# EAGLE board RectangularThing (EAGLE 7.7.0), part 1 of 2
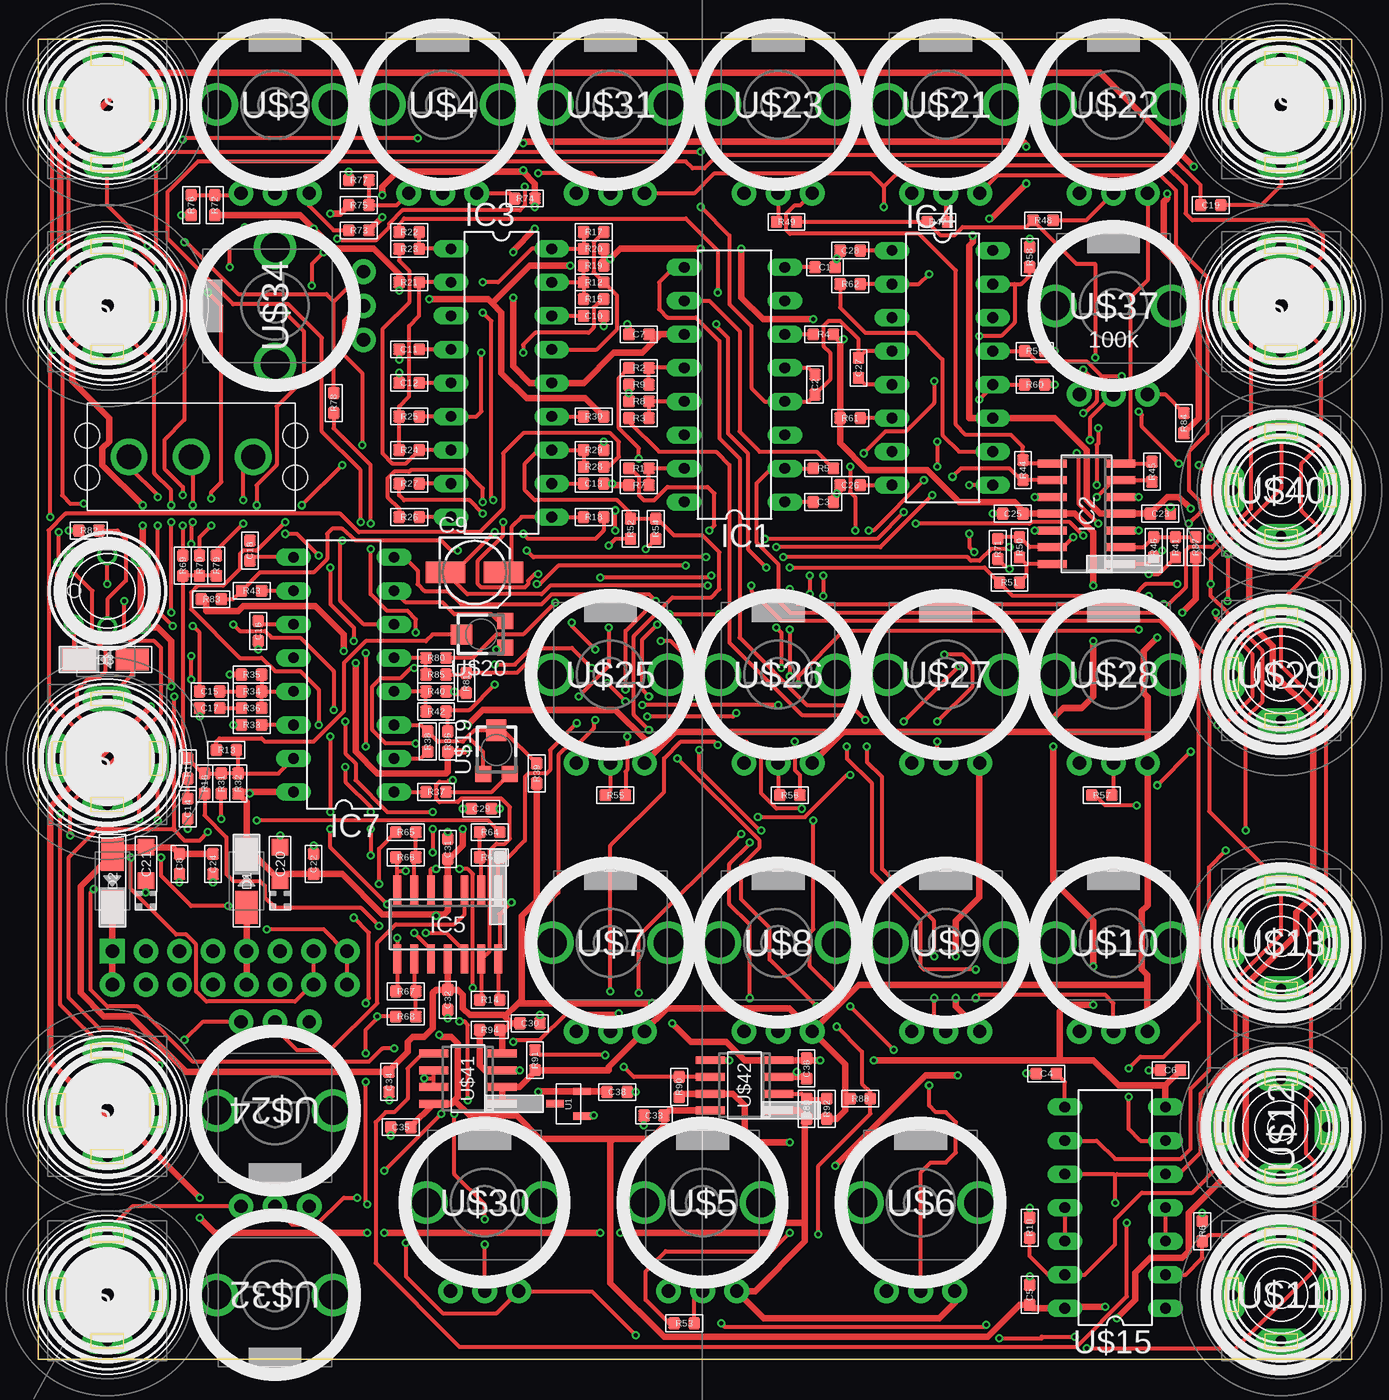
[diagram p0: board, top side]
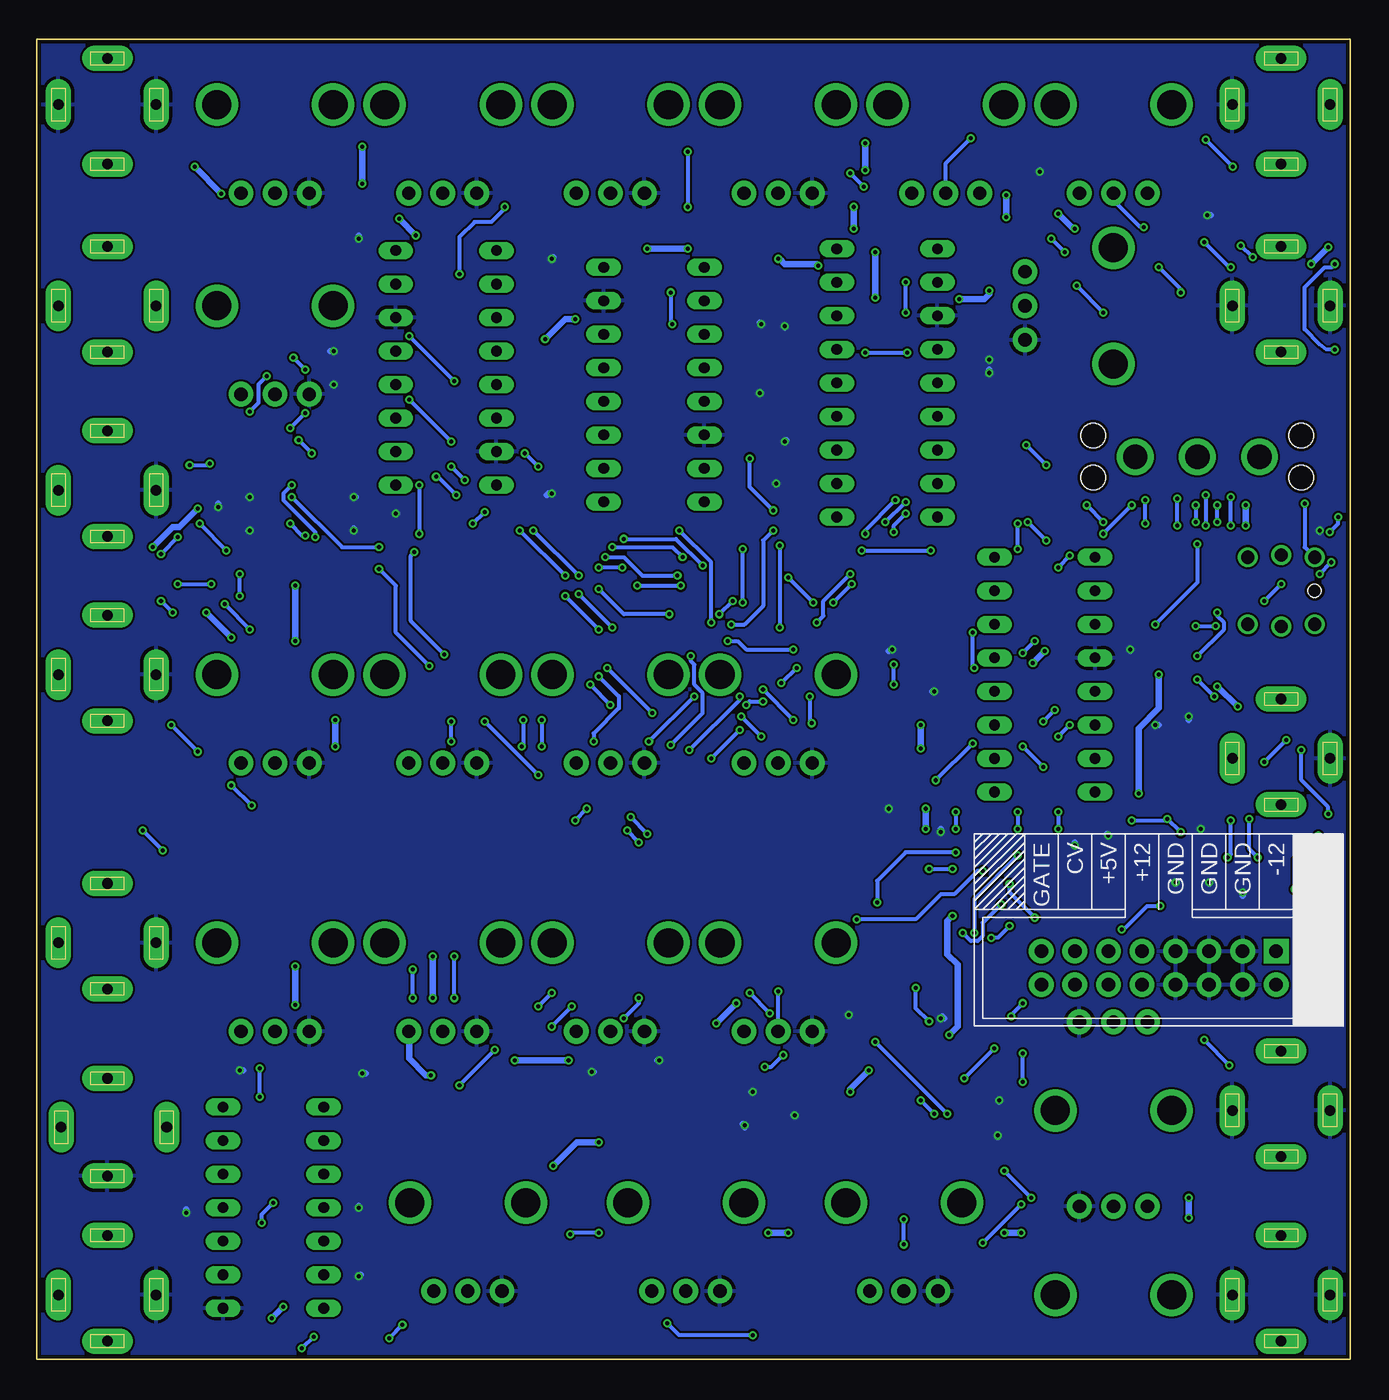
[diagram p1: board, bottom side, seen from below]

Size 99.5 x 100 mm. Coordinates in mm from the lower left corner, seen from the top.
Copper layers (1*16): Top 0.035mm / dielectric 1.5mm / Bottom 0.035mm
Design rules "ITEADstudio_DRC": minimum track width 6mil, minimum drill 12mil, track to track 6mil, track to pad 6mil, pad to pad 6mil, via to via 6mil, smd to smd 0mil, copper to edge 10mil, drill to drill 10mil, minimum pad ring 10mil, minimum via ring 6mil, stop-mask expansion 2mil, vias tented up to drill 100mil, thermal gap 10mil
Net classes: 0 default: width 0.305 mm; 1 power: width 0.508 mm; 3 groundplane: width 0.203 mm, clearance 0.203 mm

## Footprints (pad centres in the part's own frame; a part is rotated, then mirrored left to right if it is on the bottom)
C0603 = smd 0.889 x 0.889: 1 -0.762,0; 2 0.762,0
153CLV-0505 = smd 3 x 1.6: + 2.2,0; - -2.2,0
AVX-A = smd 1.27 x 1.27: + -1.27,0; - 1.27,0
DO-214AC = smd 2.5 x 1.7: 1 -2,0; 2 2,0
DIL16 = drill 0.813 long: 1 -8.89,-3.81; 2 -6.35,-3.81; 3 -3.81,-3.81; 4 -1.27,-3.81; 5 1.27,-3.81; 6 3.81,-3.81; 7 6.35,-3.81; 8 8.89,-3.81; 9 8.89,3.81; 10 6.35,3.81; 11 3.81,3.81; 12 1.27,3.81; 13 -1.27,3.81; 14 -3.81,3.81; 15 -6.35,3.81; 16 -8.89,3.81
SO14 = smd 0.6 x 2.2: 1 -3.81,-2.6; 2 -2.54,-2.6; 3 -1.27,-2.6; 4 0,-2.6; 5 1.27,-2.6; 6 2.54,-2.6; 7 3.81,-2.6; 8 3.81,2.6; 9 2.54,2.6; 10 1.27,2.6; 11 0,2.6; 12 -1.27,2.6; 13 -2.54,2.6; 14 -3.81,2.6
DIL18 = drill 0.813 long: 1 -10.16,-3.81; 2 -7.62,-3.81; 3 -5.08,-3.81; 4 -2.54,-3.81; 5 0,-3.81; 6 2.54,-3.81; 7 5.08,-3.81; 8 7.62,-3.81; 9 10.16,-3.81; 10 10.16,3.81; 11 7.62,3.81; 12 5.08,3.81; 13 2.54,3.81; 14 0,3.81; 15 -2.54,3.81; 16 -5.08,3.81; 17 -7.62,3.81; 18 -10.16,3.81
R0603 = smd 0.889 x 0.889: 1 -0.762,0; 2 0.762,0
SOT95P237X112-3N = smd 1.321 x 0.559: 1 -1.016,0.94; 2 -1.016,-0.94; 3 1.016,0
POWER_16_SHROUDED = drill 1.016 pad 1.88 square: 1 -8.89,-1.27 | drill 1.016 pad 1.88: 2 -8.89,1.27; 3 -6.35,-1.27; 4 -6.35,1.27; 5 -3.81,-1.27; 6 -3.81,1.27; 7 -1.27,-1.27; 8 -1.27,1.27; 9 1.27,-1.27; 10 1.27,1.27; 11 3.81,-1.27; 12 3.81,1.27; 13 6.35,-1.27; 14 6.35,1.27; 15 8.89,-1.27; 16 8.89,1.27
OG-POTS_ALPS_POT_VERTICAL = drill 1 pad 1.88: P$1 -2.58,-6.7; P$2 0,-6.7; P$3 2.58,-6.7 | drill 2.2 pad 3.175: P$4 4.4,0; P$5 -4.4,0
3.5MM-JACK-SWITCH-13MM-OUTPUT = drill 0.8 pad 1.93 long: RING@3 -3.7,0; SECOND@3 0,-3.5; SWITCH@3 3.7,0; TIP@3 0,4.5
3.5MM-JACK-SWITCH-13MM-INPUT = drill 0.8 pad 1.93 long: RING@3 -3.7,0; SECOND@3 0,-3.5; SWITCH@3 3.7,0; TIP@3 0,4.5
DIL14 = drill 0.813 long: 1 -7.62,-3.81; 2 -5.08,-3.81; 3 -2.54,-3.81; 4 0,-3.81; 5 2.54,-3.81; 6 5.08,-3.81; 7 7.62,-3.81; 8 7.62,3.81; 9 5.08,3.81; 10 2.54,3.81; 11 0,3.81; 12 -2.54,3.81; 13 -5.08,3.81; 14 -7.62,3.81
TC33X = smd 1.2 x 1.2: 1 -1,-1.825; 3 1,-1.825 | smd 1.5 x 1.6: 2 0,1.5
MULTICOMP1MS-ONOFFON = drill 1.85: 1 -4.7,0; 2 0,0; 3 4.7,0 | hole 1.85: -7.875,1.59; -7.875,-1.59; 7.875,1.59; 7.875,-1.59
PB6149L = drill 1: 1 2.54,2.54; 2 2.54,-2.54; 3 -2.54,2.54; 4 -2.54,-2.54; LEDNEG 0,-2.7; LEDPOS 0,2.7 | hole 1: 2.54,0
SO08 = smd 0.6 x 2.2: 1 -1.905,-2.6; 2 -0.635,-2.6; 3 0.635,-2.6; 4 1.905,-2.6; 5 1.905,2.6; 6 0.635,2.6; 7 -0.635,2.6; 8 -1.905,2.6

## Placement (x,y rotation side)
C1  0.02uF  [C0603]  59.6,82.72 180 top
C2  0.02uF  [C0603]  58.84,73.83 90 top
C3  0.039uF  [C0603]  59.48,64.94 180 top
C4  5nF  [C0603]  76.37,21.64 180 top
C5  100nF  [C0603]  75.1,4.87 270 top
C6  100nF  [C0603]  85.77,21.89 180 top
C7  100nF  [C0603]  45.51,77.64 0 top
C8  100nF  [C0603]  10.71,37.51 270 top
C9  1uF  [153CLV-0505]  33.06,59.61 0 top
C10  300pF  [C0603]  42.08,79.04 0 top
C11  300pF  [C0603]  28.11,76.5 0 top
C12  300pF  [C0603]  28.11,73.96 0 top
C13  300pF  [C0603]  42.08,66.34 0 top
C14  0.01uF  [C0603]  11.34,41.7 90 top
C15  0.1uF  [C0603]  12.99,50.59 180 top
C16  1000pF  [C0603]  16.68,55.17 270 top
C17  0.01uF  [C0603]  12.99,49.32 0 top
C18  0.001uF  [C0603]  16.04,61.26 270 top
C19  0.001uF  [C0603]  88.81,87.42 0 top
C20  10uF  [AVX-A]  18.33,37.51 90 top
C21  10uF  [AVX-A]  8.17,37.51 90 top
C22  100nF  [C0603]  20.87,37.51 90 top
C23  100nF  [C0603]  85,64.06 0 top
C24  100nF  [C0603]  13.25,37.51 90 top
C25  100nF  [C0603]  73.83,64.06 180 top
C26  0.02uF  [C0603]  61.51,66.22 0 top
C27  0.02uF  [C0603]  62.14,75.11 270 top
C28  0.039uF  [C0603]  61.51,84 0 top
C29  100nF  [C0603]  33.57,41.7 180 top
C30  100nF  [C0603]  37.25,25.45 0 top
C31  100nF  [C0603]  31.03,38.66 90 top
C32  100nF  [C0603]  31.03,27.23 270 top
C33  100nF  [C0603]  46.65,18.46 0 top
C34  100nF  [C0603]  26.58,21 270 top
C35  100nF  [C0603]  27.47,17.57 0 top
C36  100nF  [C0603]  58.21,22.02 270 top
C38  100nF  [C0603]  43.86,20.24 180 top
D1  [DO-214AC]  15.79,36.24 90 top
D2  [DO-214AC]  5.63,36.24 270 top
D3  [DO-214AC]  5.12,53.01 180 top
IC1  CEM3310  [DIL16]  52.75,73.83 90 top
IC2  TL074D  [SO14]  79.42,64.06 90 top
IC3  CEM3320  [DIL18]  35.09,73.96 270 top
IC4  CEM3310  [DIL16]  68.49,75.11 270 top
IC5  TL074D  [SO14]  31.03,32.94 180 top
IC7  CEM3340  [DIL16]  23.15,51.86 90 top
R1  10k  [R0603]  45.51,67.48 180 top
R2  10k  [R0603]  45.51,75.11 180 top
R3  10k  [R0603]  45.51,71.3 180 top
R4  470  [R0603]  59.48,77.64 0 top
R5  24k  [R0603]  59.48,67.48 180 top
R6  47k  [R0603]  88.18,9.7 90 top
R7  470  [R0603]  45.51,66.22 180 top
R8  470  [R0603]  45.51,72.56 180 top
R9  470  [R0603]  45.51,73.83 0 top
R10  47k  [R0603]  75.1,9.95 90 top
R11  470  [R0603]  11.34,44.75 270 top
R12  100k  [R0603]  42.08,81.58 180 top
R13  1M  [R0603]  14.26,46.15 180 top
R14  22k  [R0603]  34.2,27.23 0 top
R15  91k  [R0603]  42.08,80.31 180 top
R16  100k  [R0603]  12.61,43.61 90 top
R17  91k  [R0603]  42.08,85.39 180 top
R18  100k  [R0603]  42.08,63.8 0 top
R19  220k  [R0603]  42.08,82.85 0 top
R20  220k  [R0603]  42.08,84.12 0 top
R21  220k  [R0603]  28.11,81.58 0 top
R22  91k  [R0603]  28.11,85.39 180 top
R23  100k  [R0603]  28.11,84.12 180 top
R24  91k  [R0603]  28.11,68.88 0 top
R25  100k  [R0603]  28.11,71.42 0 top
R26  100k  [R0603]  28.11,63.8 180 top
R27  51k  [R0603]  28.11,66.34 0 top
R28  100k  [R0603]  42.08,67.61 180 top
R29  1.8k  [R0603]  42.08,68.88 0 top
R30  1.8k  [R0603]  42.08,71.42 180 top
R31  100k  [R0603]  13.88,43.61 90 top
R32  360k  [R0603]  15.15,43.61 90 top
R33  1.8k  [R0603]  16.17,48.05 0 top
R34  1M  [R0603]  16.17,50.59 0 top
R35  1.5M  [R0603]  16.17,51.86 0 top
R36  470  [R0603]  16.17,49.32 180 top
R37  24k  [R0603]  30.14,42.97 0 top
R38  5.6k  [R0603]  29.5,46.78 90 top
R39  820  [R0603]  37.76,44.37 270 top
R40  10k  [R0603]  30.14,50.59 0 top
R41  10k  [R0603]  86.15,61.52 90 top
R42  10k  [R0603]  30.14,49.07 0 top
R43  10k  [R0603]  16.17,58.21 180 top
R44  20k  [R0603]  74.59,67.36 90 top
R45  10k  [R0603]  84.37,67.23 90 top
R46  10k  [R0603]  84.5,61.52 270 top
R47  10k  [R0603]  68.11,86.15 180 top
R48  10k  [R0603]  76.11,86.28 180 top
R49  10k  [R0603]  56.68,86.15 0 top
R50  10k  [R0603]  74.34,61.52 270 top
R51  10k  [R0603]  73.57,58.85 180 top
R52  100k  [R0603]  44.87,62.91 90 top
R53  100k  [R0603]  48.94,2.71 180 top
R54  100k  [R0603]  46.78,62.91 90 top
R55  10k  [R0603]  43.73,42.72 180 top
R56  10k  [R0603]  56.94,42.72 180 top
R57  10k  [R0603]  80.56,42.72 0 top
R58  470  [R0603]  75.1,83.49 90 top
R59  470  [R0603]  75.48,76.38 0 top
R60  470  [R0603]  75.48,73.83 180 top
R61  470  [R0603]  61.51,71.3 180 top
R62  24k  [R0603]  61.51,81.45 0 top
R63  22k  [R0603]  34.2,38.02 0 top
R64  22k  [R0603]  34.2,39.93 180 top
R65  22k  [R0603]  27.85,39.93 0 top
R66  22k  [R0603]  27.85,38.02 180 top
R67  22k  [R0603]  27.85,27.86 180 top
R68  22k  [R0603]  27.85,25.96 0 top
R69  ?  [R0603]  10.96,60.12 270 top
R70  ?  [R0603]  12.23,60.12 270 top
R71  10k  [R0603]  72.68,61.39 90 top
R72  DNP  [R0603]  13.38,87.42 90 top
R73  ?  [R0603]  24.3,85.52 180 top
R74  ?  [R0603]  36.87,87.93 180 top
R75  DNP  [R0603]  24.3,87.42 0 top
R76  ?  [R0603]  11.6,87.42 90 top
R77  ?  [R0603]  24.3,89.33 0 top
R78  22k  [R0603]  22.39,72.44 270 top
R79  100k  [R0603]  13.5,60.12 270 top
R80  100k  [R0603]  30.14,53.13 0 top
R81  100k  [R0603]  32.43,51.23 270 top
R82  1k  [R0603]  3.85,62.79 180 top
R83  20k  [R0603]  13.12,57.58 0 top
R84  140k  [R0603]  86.78,70.91 270 top
R85  560k  [R0603]  30.14,51.86 180 top
R86  10k  [R0603]  31.03,46.78 90 top
R87  10k  [R0603]  87.67,61.52 90 top
R88  BIAS  [R0603]  62.27,19.73 0 top
R89  200k  [R0603]  58.21,18.97 270 top
R90  100k  [R0603]  48.55,20.62 270 top
R91  100k  [R0603]  37.63,22.65 90 top
R92  100k  [R0603]  59.73,18.97 90 top
R94  10k  [R0603]  34.2,24.94 180 top
U1  LM4040DIM3-5.0  [SOT95P237X112-3N]  40.17,19.35 180 top
U$1  EURORACK_PCB20HP_10X10CM  [EURORACK20HP_10X10CM]  -0.34,-3 0 top
U$2  POWERSHROUDED  [POWER_16_SHROUDED]  14.52,29.64 180 bottom
U$3  [OG-POTS_ALPS_POT_VERTICAL]  17.95,95.04 0 top
U$4  [OG-POTS_ALPS_POT_VERTICAL]  30.65,95.04 0 top
U$5  [OG-POTS_ALPS_POT_VERTICAL]  50.33,11.86 0 top
U$6  [OG-POTS_ALPS_POT_VERTICAL]  66.84,11.86 0 top
U$7  [OG-POTS_ALPS_POT_VERTICAL]  43.35,31.54 0 top
U$8  [OG-POTS_ALPS_POT_VERTICAL]  56.05,31.54 0 top
U$9  [OG-POTS_ALPS_POT_VERTICAL]  68.75,31.54 0 top
U$10  [OG-POTS_ALPS_POT_VERTICAL]  81.45,31.54 0 top
U$11  PJ-341  [3.5MM-JACK-SWITCH-13MM-OUTPUT]  94.15,4.87 0 top
U$12  PJ-341  [3.5MM-JACK-SWITCH-13MM-OUTPUT]  94.15,17.57 90 top
U$13  PJ-341  [3.5MM-JACK-SWITCH-13MM-OUTPUT]  94.15,31.54 0 top
U$14  PJ-341  [3.5MM-JACK-SWITCH-13MM-INPUT]  5.25,45.51 0 top
U$15  CEM3360  [DIL14]  81.57,11.48 90 top
U$16  PJ-341  [3.5MM-JACK-SWITCH-13MM-INPUT]  5.25,18.84 0 top
U$17  PJ-341  [3.5MM-JACK-SWITCH-13MM-INPUT]  94.15,95.04 180 top
U$18  PJ-341  [3.5MM-JACK-SWITCH-13MM-INPUT]  5.25,95.04 180 top
U$19  [TC33X]  34.71,46.15 0 top
U$20  [TC33X]  33.57,54.91 90 top
U$21  [OG-POTS_ALPS_POT_VERTICAL]  68.75,95.04 0 top
U$22  [OG-POTS_ALPS_POT_VERTICAL]  81.45,95.04 0 top
U$23  [OG-POTS_ALPS_POT_VERTICAL]  56.05,95.04 0 top
U$24  [OG-POTS_ALPS_POT_VERTICAL]  17.95,18.84 180 top
U$25  [OG-POTS_ALPS_POT_VERTICAL]  43.35,51.86 0 top
U$26  [OG-POTS_ALPS_POT_VERTICAL]  56.05,51.86 0 top
U$27  [OG-POTS_ALPS_POT_VERTICAL]  68.75,51.86 0 top
U$28  [OG-POTS_ALPS_POT_VERTICAL]  81.45,51.86 0 top
U$29  PJ-341  [3.5MM-JACK-SWITCH-13MM-OUTPUT]  94.15,51.86 0 top
U$30  [OG-POTS_ALPS_POT_VERTICAL]  33.82,11.86 0 top
U$31  [OG-POTS_ALPS_POT_VERTICAL]  43.35,95.04 0 top
U$32  [OG-POTS_ALPS_POT_VERTICAL]  17.95,4.87 180 top
U$33  PJ-341  [3.5MM-JACK-SWITCH-13MM-INPUT]  5.25,4.87 0 top
U$34  [OG-POTS_ALPS_POT_VERTICAL]  17.95,79.8 90 top
U$35  ONOFFON  [MULTICOMP1MS-ONOFFON]  11.6,68.37 0 top
U$36  PJ-341  [3.5MM-JACK-SWITCH-13MM-INPUT]  5.25,79.8 0 top
U$37  100k  [OG-POTS_ALPS_POT_VERTICAL]  81.45,79.8 0 top
U$38  PJ-341  [3.5MM-JACK-SWITCH-13MM-INPUT]  94.15,79.8 0 top
U$39  SWITCH_W_LED_PB6149L-X-102YELLOW  [PB6149L]  5.25,58.21 180 top
U$40  PJ-341  [3.5MM-JACK-SWITCH-13MM-OUTPUT]  94.15,65.83 0 top
U$41  TL072  [SO08]  32.55,21.26 90 top
U$42  TL072  [SO08]  53.51,20.75 90 top

## Library data of the parts
C1-C8 C10-C19 C22-C36 D1-D3 R1-R92 = OPL
C9 U$19 U$20 = adafruit
C20 C21 IC2 IC5 U$1 U$2 U$35 U$41 U$42 = EurorackModularParts
C38 = OPL; MF: AVX; MPN: 06035C104KAT2A; OC_FARNELL: 1301804
IC1 IC3 IC4 IC7 U$15 = CEM
R94 = OPL; OC_FARNELL: unknown
U1 = FarnellThings; MF: TEXAS INSTRUMENTS; MPN: LM4040DIM3-5.0; OC_FARNELL: 9778330; OC_NEWARK: 97K3489; PACKAGE: SOT-23-3; SUPPLIER: TEXAS INSTRUMENTS
U$3 = EurorackModularParts; DESC: Fine
U$4 = EurorackModularParts; DESC: Coarse
U$5 = EurorackModularParts; DESC: Cutoff
U$6 = EurorackModularParts; DESC: Resonance
U$7 U$25 = EurorackModularParts; DESC: A
U$8 U$26 = EurorackModularParts; DESC: D
U$9 U$27 = EurorackModularParts; DESC: S
U$10 U$28 = EurorackModularParts; DESC: R
U$11 = EurorackModularParts; DESC: Filtered; MPN: PJ-341
U$12 = EurorackModularParts; DESC: Unfiltered; MPN: PJ-341
U$13 U$29 = EurorackModularParts; DESC: Envelope; MPN: PJ-341
U$14 = EurorackModularParts; DESC: Gate; MPN: PJ-341
U$16 = EurorackModularParts; DESC: Cutoff; MPN: PJ-341
U$17 = EurorackModularParts; DESC: Sync; MPN: PJ-341
U$18 = EurorackModularParts; DESC: CV; MPN: PJ-341
U$21 = EurorackModularParts; DESC: Saw
U$22 = EurorackModularParts; DESC: Pulse
U$23 = EurorackModularParts; DESC: Triangle
U$24 = EurorackModularParts; DESC: Keytrack
U$30 = EurorackModularParts; DESC: Mod->Cutoff
U$31 = EurorackModularParts; DESC: Mod->Pitch
U$32 = EurorackModularParts; DESC: External
U$33 = EurorackModularParts; DESC: External; MPN: PJ-341
U$34 = EurorackModularParts; DESC: FM
U$36 = EurorackModularParts; DESC: FM; MPN: PJ-341
U$37 = EurorackModularParts; DESC: PWM
U$38 = EurorackModularParts; DESC: PWM; MPN: PJ-341
U$39 = zephod-components
U$40 = EurorackModularParts; DESC: Oscs; MPN: PJ-341

## Nets
5V [power]: R90.2 U$9.P$3 U$27.P$3 U$42.7
10V [power]: R84.2 R89.2 U$5.P$3 U$6.P$3 U$39.3 U$39.4 U$42.1
12V [power]: C5.2 C7.2 C20.+ C22.1 C23.1 C29.2 C31.1 C33.2 C35.2 D1.2 IC1.11 IC2.4 IC3.14 IC4.11 IC5.4 IC7.16 R32.1 R35.1 R73.1 R74.1 U$15.14 U$41.8 U$42.8
-5V [power]: R83.1 R86.1 R87.1 R88.1 R91.1 R92.1 U$7.P$3 U$8.P$3 U$10.P$3 U$25.P$3 U$26.P$3 U$28.P$3 U$41.1 U$41.2
-5VIN [power]: C38.2 R94.2 U1.2 U$41.3
-12V [power]: C6.1 C8.1 C21.- C24.2 C25.1 C30.1 C32.1 C34.1 C36.1 D2.1 IC2.11 IC5.11 R4.2 R19.2 R20.2 R21.1 R30.1 R39.2 R61.2 R72.1 R75.1 R94.1 U$15.7 U$41.4 U$42.4
A2_IN: R55.2 U$25.P$2
A_IN: R1.2 U$7.P$2
AMPENVELOPEOUT: IC1.2 R5.2 U$13.TIP@3 U$15.5 U$15.10 U$41.5
CUTOFF_ENVELOPE: IC5.7 R54.1 R66.2
CUTOFF_IN: R28.1 U$16.TIP@3
CUTOFF_INPUT: IC3.12 R28.2 R29.1 R52.2 R53.2 R54.2 R88.2
CUTOFF_KEYTRACK: IC5.1 R52.1 R63.2
CUTOFF_KNOB: R53.1 U$5.P$2
CV_RACK: U$2.13 U$2.14 U$18.SWITCH@3
D2_IN: R56.2 U$26.P$2
D_IN: R2.2 U$8.P$2
EXP_FM_IN: R79.1 U$35.3
FILTER_OUT: C9.- R27.1 U$15.6
GATE_IN: C2.1 C27.1 D3.2 IC1.4 IC4.4 U$39.1 U$39.2
GATE_RACK: U$2.15 U$2.16 U$14.SWITCH@3
GATELED: U$39.LEDNEG U$41.6 U$41.7
GND [power]: C1.1 C3.1 C4.2 C5.1 C6.2 C7.1 C8.2 C10.2 C11.1 C12.1 C13.2 C14.1 C16.2 C17.1 C20.- C21.+ C22.2 C23.2 C24.1 C25.2 C26.1 C28.1 C29.1 C30.2 C31.2 C32.2 C33.1 C34.2 C35.1 C36.2 C38.1 IC1.7 IC1.14 IC2.3 IC2.5 IC2.10 IC2.12 IC3.3 IC4.7 IC4.14 IC7.12 R6.2 R7.2 R8.2 R9.1 R10.2 R29.2 R33.1 R40.2 R58.2 R59.2 R60.1 R76.1 R77.1 R81.2 R82.2 U1.1 U$2.3 U$2.4 U$2.5 U$2.6 U$2.7 U$2.8 U$5.P$1 U$6.P$1 U$7.P$1 U$8.P$1 U$9.P$1 U$10.P$1 U$11.RING@3 U$12.RING@3 U$13.RING@3 U$14.RING@3 U$15.1 U$16.RING@3 U$16.SWITCH@3 U$17.RING@3 U$17.SWITCH@3 U$18.RING@3 U$20.1 U$21.P$1 U$22.P$1 U$23.P$1 U$24.P$1 U$25.P$1 U$26.P$1 U$27.P$1 U$28.P$1 U$29.RING@3 U$30.P$1 U$31.P$1 U$32.P$1 U$33.RING@3 U$33.SWITCH@3 U$34.P$1 U$36.RING@3 U$36.SWITCH@3 U$37.P$1 U$40.RING@3 U$42.3 U$42.5
HARDSYNC_IN: C19.2 U$17.TIP@3
LINEAR_FM_IN: C15.2 U$35.1
MAIN_CV: R31.1 R64.1 U$18.TIP@3 U$24.P$3
MODENVOUT: IC4.2 R62.2 R65.1 R68.1 U$29.TIP@3 U$30.P$3 U$31.P$3
N$1: IC1.15 R1.1 R7.1
N$2: IC1.12 R2.1 R9.2
N$3: IC1.13 R3.1 R8.1
N$4: C3.2 IC1.1
N$5: C4.1 U$15.8
N$6: C2.2 IC1.5
N$7 [power]: D1.1 U$2.9 U$2.10
N$8 [power]: D2.2 U$2.1 U$2.2
N$9: IC1.6 R4.1
N$10: C1.2 IC1.8
N$11: IC1.10 R5.1
N$12: U$15.3 U$15.4
N$13: R6.1 U$11.TIP@3 U$15.2
N$14: R10.1 U$12.TIP@3 U$15.13
N$15: U$15.11 U$15.12
N$16: C14.2 R11.2
N$17: C10.1 IC3.16
N$18: C11.2 IC3.4
N$19: C12.2 IC3.5
N$20: C13.1 IC3.11
N$21: IC3.9 R26.1
N$23: IC3.1 R22.1 R23.1
N$24: IC3.7 R23.2 R24.2
N$25: IC3.6 R15.1 R25.2
N$26: IC3.18 R17.2 R18.2 R20.1
N$27: IC3.17 R12.2 R15.2 R19.1
N$28: IC3.15 R12.1 R17.1
N$29: IC3.13 R30.2
N$30: C9.+ IC3.10 R18.1
N$31: C17.2 R36.2
N$32: IC3.8 R27.2
N$33: IC3.2 R21.2 R24.1 R25.1
N$34: IC7.13 R34.2 R35.2 R36.1
N$35: C15.1 R34.1
N$36: C16.1 IC7.11
N$37: C18.2 IC7.9
N$38: IC7.14 R33.2
N$39: IC2.14 R50.2 R51.1
N$40: IC2.13 R47.2 R48.2 R49.2 R50.1 R71.2
N$41: IC5.14 R14.2 U$35.2
N$42: C19.1 IC7.6
N$43: IC7.1 R37.1
N$44: R37.2 U$19.3
N$45: IC7.3 R38.2 R39.1 U$19.1 U$19.2
N$46: R13.2 U$20.2
N$47: IC7.2 R38.1
N$48: IC7.7 U$20.3
N$49: R49.1 U$23.P$2
N$50: R48.1 U$22.P$2
N$51: R47.1 U$21.P$2
N$52: IC2.1 R46.2 U$21.P$3
N$53: IC2.7 R45.2 U$22.P$3
N$54: IC2.6 R42.2 R45.1 R86.2
N$55: IC2.2 R41.2 R46.1 R87.2
N$56: IC2.9 R43.2 R44.1 R83.2
N$57: IC2.8 R44.2 U$23.P$3
N$58: IC4.15 R55.1 R58.1
N$59: IC4.12 R56.1 R60.2
N$60: IC4.13 R57.1 R59.1
N$61: C27.2 IC4.5
N$62: IC4.6 R61.1
N$63: C26.2 IC4.8
N$64: IC4.10 R62.1
N$65: C28.2 IC4.1
N$66: IC5.13 R14.1 R78.2
N$67: IC5.2 R63.1 R64.2
N$68: IC5.3 U$24.P$2
N$69: IC5.6 R65.2 R66.1
N$70: R73.2 U$3.P$3
N$71: R72.2 R76.2 U$3.P$1
N$72: IC5.9 R67.1 R68.2
N$73: IC5.5 U$30.P$2
N$74: R74.2 U$4.P$3
N$75: R71.1 U$32.P$2
N$76: U$32.P$3 U$33.TIP@3
N$77: R75.2 R77.2 U$4.P$1
N$78: IC5.10 U$31.P$2
N$79: R69.1 U$4.P$2
N$80: R70.1 U$3.P$2
N$81: IC5.12 U$34.P$2
N$82: R78.1 U$34.P$3 U$36.TIP@3
N$83: R80.2 U$37.P$2
N$84: R84.1 U$37.P$3
N$85: R81.1 R85.1 U$38.TIP@3
N$86: D3.1 U$14.TIP@3
N$88: R82.1 U$39.LEDPOS
N$91: R89.1 R92.2 U$42.2
N$93: R90.1 R91.2 U$42.6
OSCSUM: R22.2 R51.2 U$15.9 U$40.TIP@3
PITCH_ENV: IC5.8 R16.1 R67.2
PITCH_IN: IC7.15 R11.1 R13.1 R16.2 R31.2 R32.2 R69.2 R70.2 R79.2
PULSE_OUT: IC7.4 R40.1 R42.1
PWM_IN: IC7.5 R80.1 R85.2
R2_IN: R57.2 U$28.P$2
R_IN: R3.2 U$10.P$2
RESONANCE_IN: R26.2 U$6.P$2
S2_IN: IC4.9 U$27.P$2
S_IN: IC1.9 U$9.P$2
SAWTOOTH_OUT: IC7.8 R41.1
SOFTSYNC_IN: C18.1
TRIANGLE_OUT: IC7.10 R43.1